# Altium PCB scope-hub.PcbDoc
Units mm, origin at the board's own origin, x right, y up, seen from the top; angles counter-clockwise.
Board outline 23.2 x 33.2 mm, 2 copper layers (Top Layer, Bottom Layer), stack 1.569 mm thick; 13 components, 17 nets, 98 pads, 8 vias.
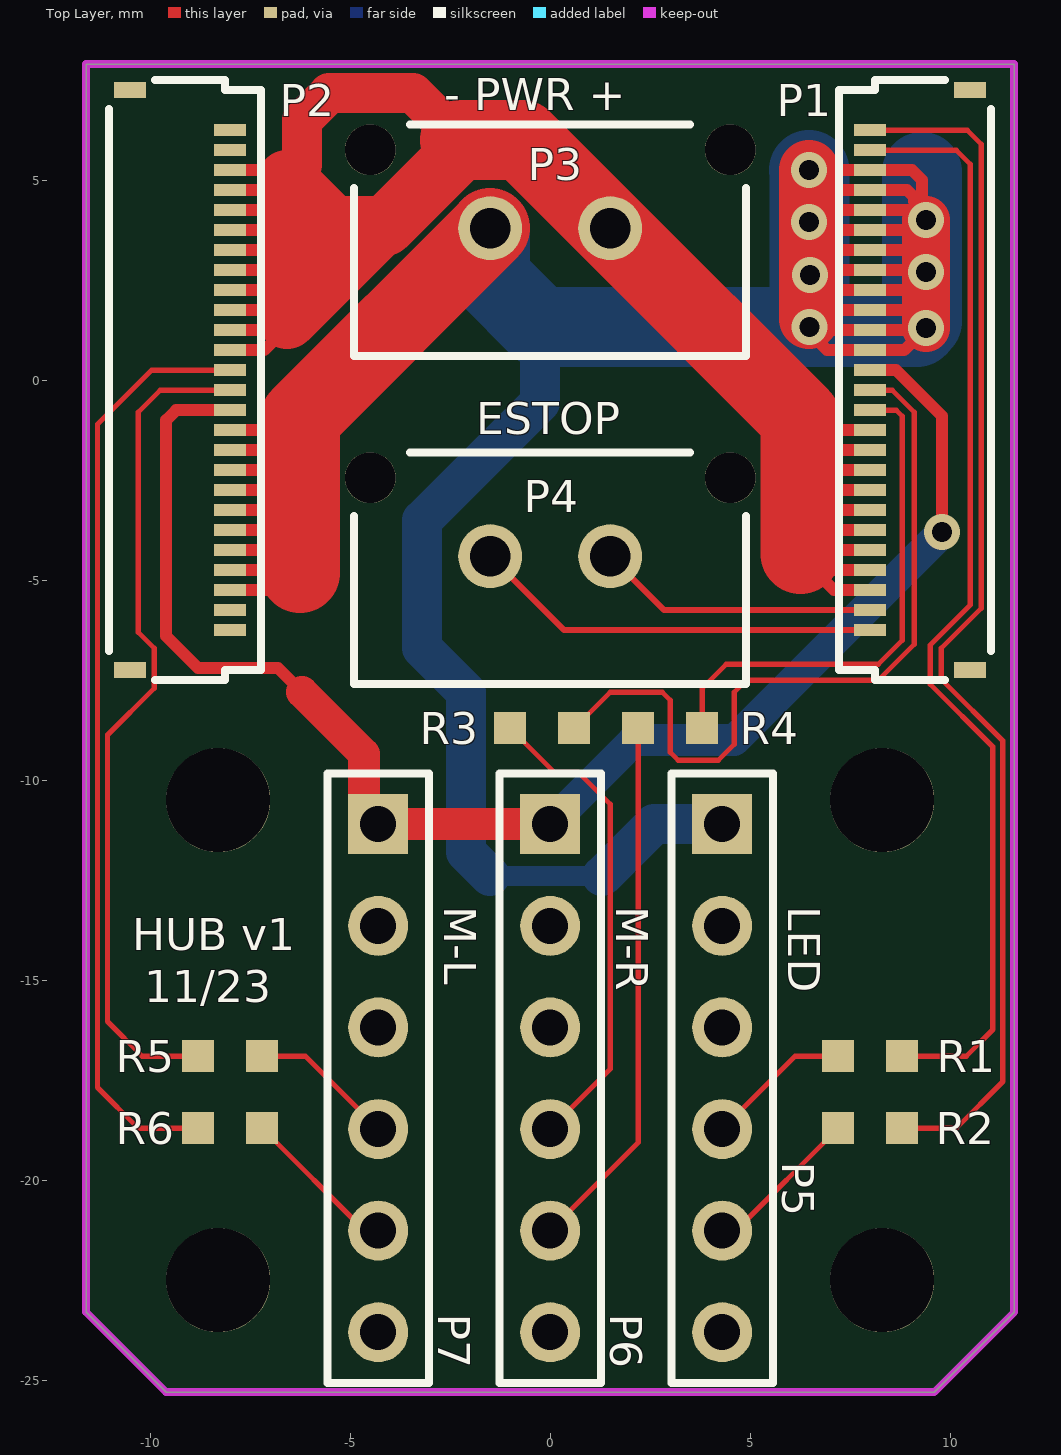
[diagram p0: Top Layer view]
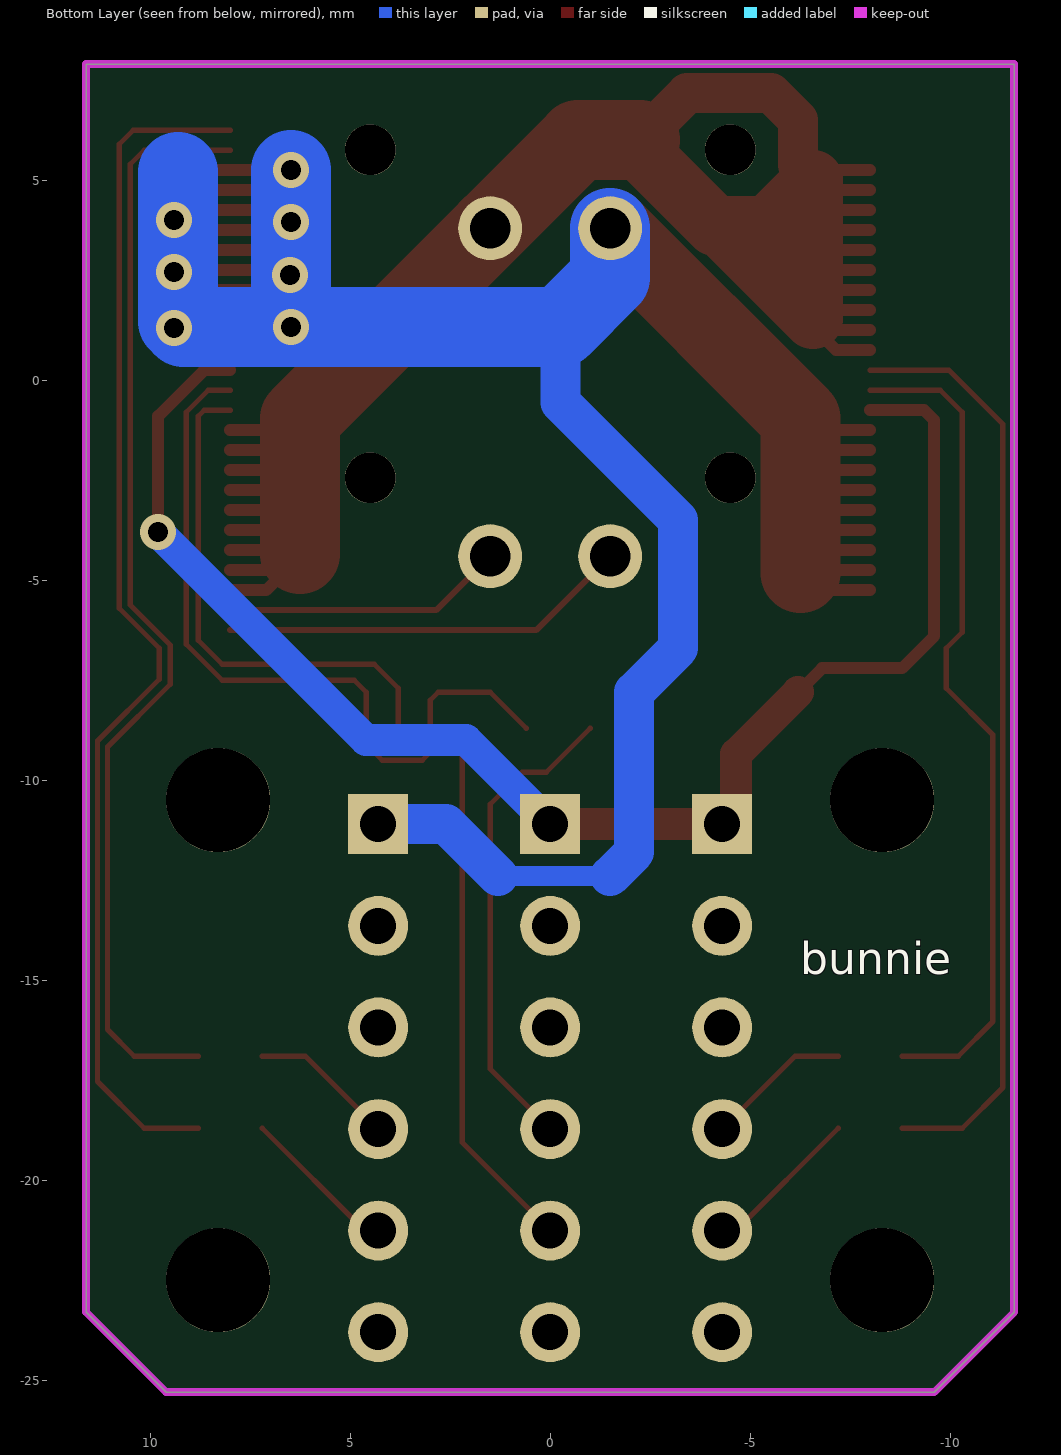
[diagram p1: Bottom Layer view, seen from below]

## Layer stack, top to bottom
Top Solder: solder mask 0.0254, SM-001, Dk 4
Top Layer: signal copper 0.035
Dielectric 1: core 1.4986, Core-043, Dk 4.3
Bottom Layer: signal copper 0.035
Bottom Solder: solder mask 0.0254, SM-001, Dk 4

## Board outline
-11.6,-23.3 -9.6,-25.3 9.6,-25.3 11.6,-23.3 11.6,7.9 -11.6,7.9

## Design rules (kind name [scope] priority, off if disabled: settings)
Clearance [All vs IsPad and not PadIsPlated] p1: gap=1.35 ignorepadtopadclearanceinfootprint=FALSE except(0: Arc-Hole Track-Hole SMDPad-Hole THPad-Hole Via-Hole Fill-Hole Poly-Hole Region-Hole Text-Hole)
Clearance Clearance_1 [All] p2: gap=0.12 ignorepadtopadclearanceinfootprint=FALSE except(0: Arc-Hole Track-Hole SMDPad-Hole THPad-Hole Via-Hole Fill-Hole Poly-Hole Region-Hole Text-Hole)
ComponentClearance [All] p1 off: gap=0.254 collisioncheckmode=3 verticalgap=0.254 showdistances=FALSE
DiffPairsRouting [All] p1: maxlimit=0.3 minlimit=0.15 mostfreqgap=0.15 toplayer_minwidth=0.15 toplayer_maxwidth=0.8 toplayer_prefwidth=0.8 bottomlayer_minwidth=0.15 bottomlayer_maxwidth=0.8 bottomlayer_prefwidth=0.8 maxuncoupledlength=12.7
HoleSize [All] p1: absolutevalues=TRUE maxlimit=2.7 minlimit=0.025 maxpercent=80.000 minpercent=20.000
MinimumSolderMaskSliver [All] p1 off: minsoldermaskwidth=0.254
PolygonConnect [All] p1: thpad.connectstyle=Relief thpad.reliefconductorwidth=0.3 thpad.reliefentries=4 thpad.polygonreliefangle="90 Angle" thpad.airgapwidth=0.2 smdpad.connectstyle=Relief smdpad.reliefconductorwidth=0.3 smdpad.reliefentries=4 smdpad.polygonreliefangle="90 Angle" smdpad.airgapwidth=0.2 via.connectstyle=Direct via.reliefconductorwidth=0.254 via.reliefentries=4 via.polygonreliefangle="90 Angle" via.airgapwidth=0.254
RoutingVias [All] p1: holewidth=0.3 width=0.6 viastyle="Through Hole" minholewidth=0.3 minwidth=0.6 maxholewidth=0.5 maxwidth=0.9
SilkToSilkClearance [All] p1 off: silktosilkclearance=0.254
SilkToSolderMaskClearance [IsPad] p1 off: minsilkscreentomaskgap=0.254 clearancetoexposedcopper=TRUE
SolderMaskExpansion [All] p1: expansion=0.07 istentingtop=FALSE
Width [All] p1: maxlimit=5 minlimit=0.13 preferedwidth=0.15
24 further rules are at their usual default settings.

## Components (designator, comment, footprint, x,y, rotation, side; value= is the part's Value field where it differs from the comment)
P1 "26-pin FPC" HRS_FH34SRJ-26S-0.5SH(50) 8,0 r90 top
P2 "26-pin FPC" HRS_FH34SRJ-26S-0.5SH(50) -8,0 r270 top
P3 "Microfit vertical header" MOLEX_0436500217 0,3.8 r180 top
P4 "Microfit vertical header" MOLEX_0436500217 0,-4.4 r180 top
P5 "Male 2.54mm 6x1 header" HDR1X6 4.3,-11.1 r270 top
P6 "Male 2.54mm 6x1 header" HDR1X6 0,-11.1 r270 top
P7 "Male 2.54mm 6x1 header" HDR1X6 -4.3,-11.1 r270 top
R1 "27, 1%" B_RES0603 8,-16.9 r180 top
R2 "27, 1%" B_RES0603 8,-18.7 r180 top
R3 "27, 1%" B_RES0603 -0.2,-8.7 r180 top
R4 "27, 1%" B_RES0603 3,-8.7 r180 top
R5 "27, 1%" B_RES0603 -8,-16.9 r0 top
R6 "27, 1%" B_RES0603 -8,-18.7 r0 top

## Footprints (in the part's own frame and the unit in brackets; to place one, negate y for a bottom-side part, rotate by r counter-clockwise, add the part's x,y. Pads: shape width x height; smd on the part's side, far side on the other; paste and mask are expansions set on the pad)
B_RES0603 [mm] "Resistor 0603"
  rect 0.8x0.8 smd mask+0.07: 1(-0.8,0) 2(0.8,0)
  body extent -0.85,-0.45 0.85,0.45, height 0.9
HDR1X6 [mm] "Connector; Header; 6 Position"
  rect 1.5x1.5 hole 0.9: 1(0,0)
  round 1.5 hole 0.9: 2(2.54,0) 3(5.08,0) 4(7.62,0) 5(10.16,0) 6(12.7,0)
  silkscreen extent -1.27,-1.27 13.97,1.27
HRS_FH34SRJ-26S-0.5SH(50) [mm] "Top/bottom entry, back-lock 0.3mm thick FPC, 26 pins"
  rect 0.4x0.8 smd mask+0.07: 0(-7.25,-2.5) 0(7.25,-2.5)
  rect 0.3x0.8 smd mask+0.07: 1(6.25,0) 2(5.75,0) 3(5.25,0) 4(4.75,0) 5(4.25,0) 6(3.75,0) 7(3.25,0) 8(2.75,0) 9(2.25,0) 10(1.75,0) 11(1.25,0) 12(0.75,0) 13(0.25,0) 14(-0.25,0) 15(-0.75,0) 16(-1.25,0) 17(-1.75,0) 18(-2.25,0) 19(-2.75,0) 20(-3.25,0) 21(-3.75,0) 22(-4.25,0) 23(-4.75,0) 24(-5.25,0) 25(-5.75,0) 26(-6.25,0)
  silkscreen extent -7.5,-3.03 7.5,0.77, body extent -7.5,-3.02 7.5,0.78, height 1
MOLEX_0436500217 [mm] "Micro-Fit 3.0 Single row vertical through hole with pegs"
  round 1.27 hole 1.27: 0(-4.5,-1.96) 0(4.5,-1.96)
  round 1.6 hole 1.02: 1(-1.5,0) 2(1.5,0)
  silkscreen extent -4.9,-2.6 4.9,3.2, body extent -4.83,-2.47 4.83,3.14, height 9.9

## Part data
P1 P2: library part FPC-26, "26 Pin FPC header", MPN=FH34SRJ-26S-0.5SH(99), MYPN=J-FPC-0.5mm-26-0.3mm-T/B, System=Connector, VENDOR=Hirose
P3 P4: library part "Header 2", "Header, 2-Pin", MPN=0436500217, LatestRevisionDate=17-Jul-2002, LatestRevisionNote="Re-released for DXP Platform.", Publisher="Altium Limited", VENDOR=Molex
P5 P6 P7: library part "Header 6", "Header, 6-Pin", MPN="PH1-06-UA / ANY", LatestRevisionDate=17-Jul-2002, LatestRevisionNote="Re-released for DXP Platform.", Publisher="Altium Limited", VENDOR="Adam Tech / ANY"
R1 R2 R3 R4 R5 R6: library part Res1, "Resistor", MPN=ANY, MYPN=R-270-1P-1_16W-0603, VENDOR=ANY

## Free pads (board coordinates)
  round 2.6 hole 2.6 unplated mask+1.2: 0(-8.3,-22.5) 0(-8.3,-10.5) 0(8.3,-22.5) 0(8.3,-10.5)

## Via types
v1: diameter 0.9, hole 0.5, Top Layer to Bottom Layer, tented both sides, 8 vias

## Nets (pads, with @x,y where several pads share a name; then routed paths per layer and width w, separated by ;. In a path a pad name is that pad's centre, name@x,y a point inside that pad or via, vN(x,y) a via of type N, cw(c..) or ccw(c..) an arc to the next point about the centre after c; other vN are vias at no path point)
ESTOP1: P1.25 P4.1 | length 7.1
  Top Layer w0.15: P4.1 2.85,-5.75 P1.25
ESTOP2: P1.26 P4.2 | length 10.3
  Top Layer w0.15: P4.2 0.35,-6.25 P1.26
GND: P1.3 P1.4 P1.5 P1.6 P1.7 P1.8 P1.9 P1.10 P1.11 P1.12 P2.3 P2.4 P2.5 P2.6 P2.7 P2.8 P2.9 P2.10 P2.11 P3.2 P5.1 | length 93.7
  Top Layer w0.3: P2.3 -7.1,-5.25 ; P2.4 -7.1,-4.75 ; P2.5 -7.1,-4.25 ; P2.6 -7.1,-3.75 ; P2.7 -7.1,-3.25 ; P2.8 -7.1,-2.75 ; P2.9 -7.1,-2.25 ; P2.10 -7.1,-1.75 ; P2.11 -7.1,-1.25 ; v1(6.475,5.25) P1.3 9.05,5.25 9.3,5 v1@9.3,4.262 ; v1@6.675,1 6.925,0.75 P1.12 8.85,0.75 v1@9.35,1.25 ; 7.1,1.25 P1.11 v1@9.35,1.25 ; 7.1,1.75 P1.10 8.85,1.75 9.3,1.3 v1(9.4,1.3) v1@9.35,1.25 ; 7.1,2.25 P1.9 8.85,2.25 9.3,2.7 v1(9.4,2.7) 9.35,2.75 P1.8 7.1,2.75 ; 7.1,3.25 P1.7 9.3,3.25 9.4,3.35 ; 7.1,3.75 P1.6 8.988,3.75 v1@9.238,4 ; 7.1,4.25 P1.5 8.988,4.25 v1@9.238,4 ; 7.1,4.75 P1.4 8.924,4.75 9.1,4.574 9.1,4.462 v1@9.3,4.262 ; v1@9.238,4 v1(9.4,4) ; v1@9.3,4.262 9.4,4.162 v1(9.4,4) ; v1@9.3,4.262 9.3,4.1 v1(9.4,4)
  Top Layer w1.2: v1(9.4,1.3) v1(9.4,2.7) 9.4,3.35 v1(9.4,4)
  Top Layer w1.5: v1@6.475,1.525 v1(6.475,3.95) v1(6.475,5.25)
  Top Layer w2: -6.255,-4.82 -6.255,-0.955 P3.2
  Bottom Layer w0.5: -1.5,-12.4 1.3,-12.4
  Bottom Layer w1: -1.5,-12.4 -2.1,-11.8 -2.1,-7.8 -3.2,-6.7 -3.2,-3.5 -0.26,-0.56 -0.26,1.332 ; 1.3,-12.4 2.6,-11.1 P5.1
  Bottom Layer w2: P3.2 -1.5,2.572 -0.26,1.332 v1(6.479,1.332) ; v1(6.475,5.25) 6.479,5.246 v1(6.479,1.332) ; 9.3,5.2 9.3,1.465 9.166,1.332 v1(6.479,1.332)
  other v1: 6.5,2.625
NetP5_4: P5.4 R1.2 | length 3.7
  Top Layer w0.13: P5.4 6.12,-16.9 R1.2
NetP5_5: P5.5 R2.2 | length 4
  Top Layer w0.13: P5.5 4.64,-21.26 R2.2
NetP6_4: P6.4 R3.2 | length 12
  Top Layer w0.13: R3.2 0.1,-9.8 0.7,-9.8 1.5,-10.6 1.5,-17.22 P6.4
NetP6_5: P6.5 R4.2 | length 13.5
  Top Layer w0.13: P6.5 2.2,-19.06 R4.2
NetP7_4: P7.4 R5.2 | length 3.7
  Top Layer w0.13: R5.2 -6.12,-16.9 P7.4
NetP7_5: P7.5 R6.2 | length 4
  Top Layer w0.13: R6.2 -4.64,-21.26 P7.5
P24V: P1.16 P1.17 P1.18 P1.19 P1.20 P1.21 P1.22 P1.23 P1.24 P2.15 P2.16 P2.17 P2.18 P2.19 P2.20 P2.21 P2.22 P2.23 P2.24 P3.1 | length 52.5
  Top Layer w0.3: P2.15 -7.15,0.75 -6.825,1.075 ; P2.16 -7.1,1.25 ; P2.17 -7.1,1.75 ; P2.18 -7.1,2.25 ; P2.19 -7.1,2.75 ; P2.20 -7.1,3.25 ; P2.21 -7.1,3.75 ; P2.22 -7.1,4.25 ; P2.23 -7.1,4.75 ; P2.24 -7.1,5.25 ; 6.255,-4.35 6.255,-4.405 7.1,-5.25 P1.24 ; 7.1,-4.75 P1.23 ; 7.1,-4.25 P1.22 ; 7.1,-3.75 P1.21 ; 7.1,-3.25 P1.20 ; 7.1,-2.75 P1.19 ; 7.1,-2.25 P1.18 ; 7.1,-1.75 P1.17 ; 7.1,-1.25 P1.16
  Top Layer w1: -6.575,5 -6.2,5.375 -6.2,6.5 -5.525,7.175 -3.425,7.175 -2.25,6
  Top Layer w1.5: -2.25,6 -2.25,5.725 -4.125,3.85 -4.25,3.85 ; -4.25,3.85 -5.425,3.85 -6.575,5 -6.575,1.525 -4.25,3.85
  Top Layer w2: -2.25,6 -0.7,6 P3.1 6.255,-0.955 6.255,-4.35
RXM1: P1.15 R4.1 | length 13
  Top Layer w0.13: R4.1 3.8,-7.7 4.4,-7.1 8.2,-7.1 8.8,-6.5 8.8,-0.9 8.65,-0.75 P1.15
RXM2: P2.14 R6.1 | length 23.4
  Top Layer w0.13: R6.1 -10.3,-18.7 -11.315,-17.685 -11.315,-1.1 -9.965,0.25 P2.14
SGND: P1.13 P2.12 P6.1 P7.1 | length 37.5
  Top Layer w0.3: P2.12 -9.35,-0.75 -9.6,-1 -9.6,-6.4 -8.8,-7.2 -6.8,-7.2 -6.2,-7.8 ; P1.13 8.65,0.25 9.8,-0.9 v1(9.8,-3.8)
  Top Layer w0.8: -6.2,-7.8 -4.65,-9.35 -4.65,-10.75 P7.1 P6.1
  Bottom Layer w0.8: P6.1 2.1,-9 4.6,-9 v1(9.8,-3.8)
TXM1: P1.14 R3.1 | length 19.4
  Top Layer w0.13: R3.1 1.5,-7.8 2.8,-7.8 3,-8 3,-9.3 3.2,-9.5 4.2,-9.5 4.6,-9.1 4.6,-7.8 4.9,-7.5 8.2,-7.5 9.1,-6.6 9.1,-0.8 8.55,-0.25 P1.14
TXM2: P2.13 R5.1 | length 21
  Top Layer w0.13: R5.1 -10.2,-16.9 -11.065,-16.035 -11.065,-8.865 -9.9,-7.7 -9.9,-6.7 -10.3,-6.3 -10.3,-0.8 -9.75,-0.25 P2.13
UART1_RX: P1.2 R1.1 | length 27.9
  Top Layer w0.13: P1.2 10.15,5.75 10.5,5.4 10.5,-5.621 9.5,-6.621 9.5,-7.6 11.065,-9.165 11.065,-16.235 10.4,-16.9 R1.1
UART1_TX: P1.1 R2.1 | length 30.4
  Top Layer w0.13: P1.1 10.425,6.25 10.775,5.9 10.775,-5.7 9.775,-6.7 9.775,-7.475 11.315,-9.015 11.315,-17.535 10.15,-18.7 R2.1
pads on no net: P1.0 P2.0 P2.1 P2.2 P2.25 P2.26 P3.0 P4.0 P5.2 P5.3 P5.6 P6.2 P6.3 P6.6 P7.2 P7.3 P7.6

## Keep-outs
Keep-Out Layer:
  the board outline again, w0.2

## Silkscreen, mask and mechanical layers (free items; w line width, h text height)
Top Overlay:
  text "- PWR +" at -2.65,6.75 h0.8
  text "ESTOP" at -1.85,-1.35 h0.8
  text "M-L" at -2.65,-13.15 h0.8 r270
  text "M-R" at 1.65,-13.15 h0.8 r270
  text "LED" at 5.95,-13.15 h0.8 r270
  text "HUB v1" at -10.45,-14.25 h0.8
  text "11/23" at -10.15,-15.55 h0.8
Bottom Overlay:
  text "bunnie" at -6.25,-14.85 h0.8
Mechanical 1:
  lines w0.2: -13.3,10.9 12.8,10.9 ; -11.5,0 11.5,0 ; 0,0 0,10.9
Mechanical 15:
  lines w0.381: -13.536,28.848 -3.124,28.848 30.648,28.848 45.884,28.848 62.39,28.848 76.865,28.848 ; -13.536,31.896 -3.124,31.896 30.648,31.896 45.884,31.896 62.39,31.896 76.865,31.896 ; -13.536,34.944 -3.124,34.944 30.648,34.944 45.884,34.944 62.39,34.944 76.865,34.944 ; -13.536,37.992 -3.124,37.992 30.648,37.992 45.884,37.992 62.39,37.992 76.865,37.992 ; -13.536,41.04 -3.124,41.04 30.648,41.04 45.884,41.04 62.39,41.04 76.865,41.04 ; -13.536,44.088 -3.124,44.088 30.648,44.088 45.884,44.088 62.39,44.088 76.865,44.088 ; -13.536,47.136 -3.124,47.136 30.648,47.136 45.884,47.136 62.39,47.136 76.865,47.136 ; -13.536,50.184 -3.124,50.184 30.648,50.184 45.884,50.184 62.39,50.184 76.865,50.184 ; -13.536,53.232 76.865,53.232 ; -3.124,56.28 -3.124,25.8 ; 30.648,56.28 30.648,25.8 ; 45.884,56.28 45.884,25.8 ; 62.39,56.28 62.39,25.8 ; -3.124,25.8 30.648,25.8 ; -3.124,25.8 -13.536,25.8 -13.536,56.28 76.865,56.28 76.865,25.8 62.39,25.8 ; 30.648,25.8 45.884,25.8 ; 45.884,25.8 62.39,25.8
  text "Layer" at -11.758,53.994 h1.52
  text "Name" at -1.346,53.994 h1.52
  text "Material" at 32.426,53.994 h1.52
  text "Thickness" at 47.662,53.994 h1.52
  text "Constant" at 64.168,53.994 h1.52
  text "Top Overlay" at -1.346,50.946 h1.52
  text "Top Solder" at -1.346,47.898 h1.52
  text "SM-001" at 32.426,47.898 h1.52
  text "0.025mm" at 47.662,47.898 h1.52
  text "4" at 64.168,47.898 h1.52
  text "Top Surface Finish" at -1.346,44.85 h1.52
  text "PbSn" at 32.426,44.85 h1.52
  text "0.020mm" at 47.662,44.85 h1.52
  text "1" at -11.758,41.802 h1.52
  text "Top Layer" at -1.346,41.802 h1.52
  text "CF-004" at 32.426,41.802 h1.52
  text "0.035mm" at 47.662,41.802 h1.52
  text "Dielectric 1" at -1.346,38.754 h1.52
  text "Core-043" at 32.426,38.754 h1.52
  text "1.499mm" at 47.662,38.754 h1.52
  text "4.3" at 64.168,38.754 h1.52
  text "2" at -11.758,35.706 h1.52
  text "Bottom Layer" at -1.346,35.706 h1.52
  text "CF-004" at 32.426,35.706 h1.52
  text "0.035mm" at 47.662,35.706 h1.52
  text "Bottom Surface Finish" at -1.346,32.658 h1.52
  text "PbSn" at 32.426,32.658 h1.52
  text "0.020mm" at 47.662,32.658 h1.52
  text "Bottom Solder" at -1.346,29.61 h1.52
  text "SM-001" at 32.426,29.61 h1.52
  text "0.025mm" at 47.662,29.61 h1.52
  text "4" at 64.168,29.61 h1.52
  text "Bottom Overlay" at -1.346,26.562 h1.52
  text "Total board thickness:" at -11.758,23.514 h1.52
  text "1.659mm" at 47.662,23.514 h1.52
  text "Soldermask: Green / Silkscreen: White" at -11.8,21.05 h1.5
  text "Finish: HASL" at -11.55,18.55 h1.5